# Altium PCB 2.PcbDoc
Units mm, origin at the board's own origin, x right, y up, seen from the top; angles counter-clockwise.
Board outline 61.34 x 53.59 mm, 2 copper layers (Top Layer, Bottom Layer); 11 components, 38 nets, 102 pads, 0 vias.
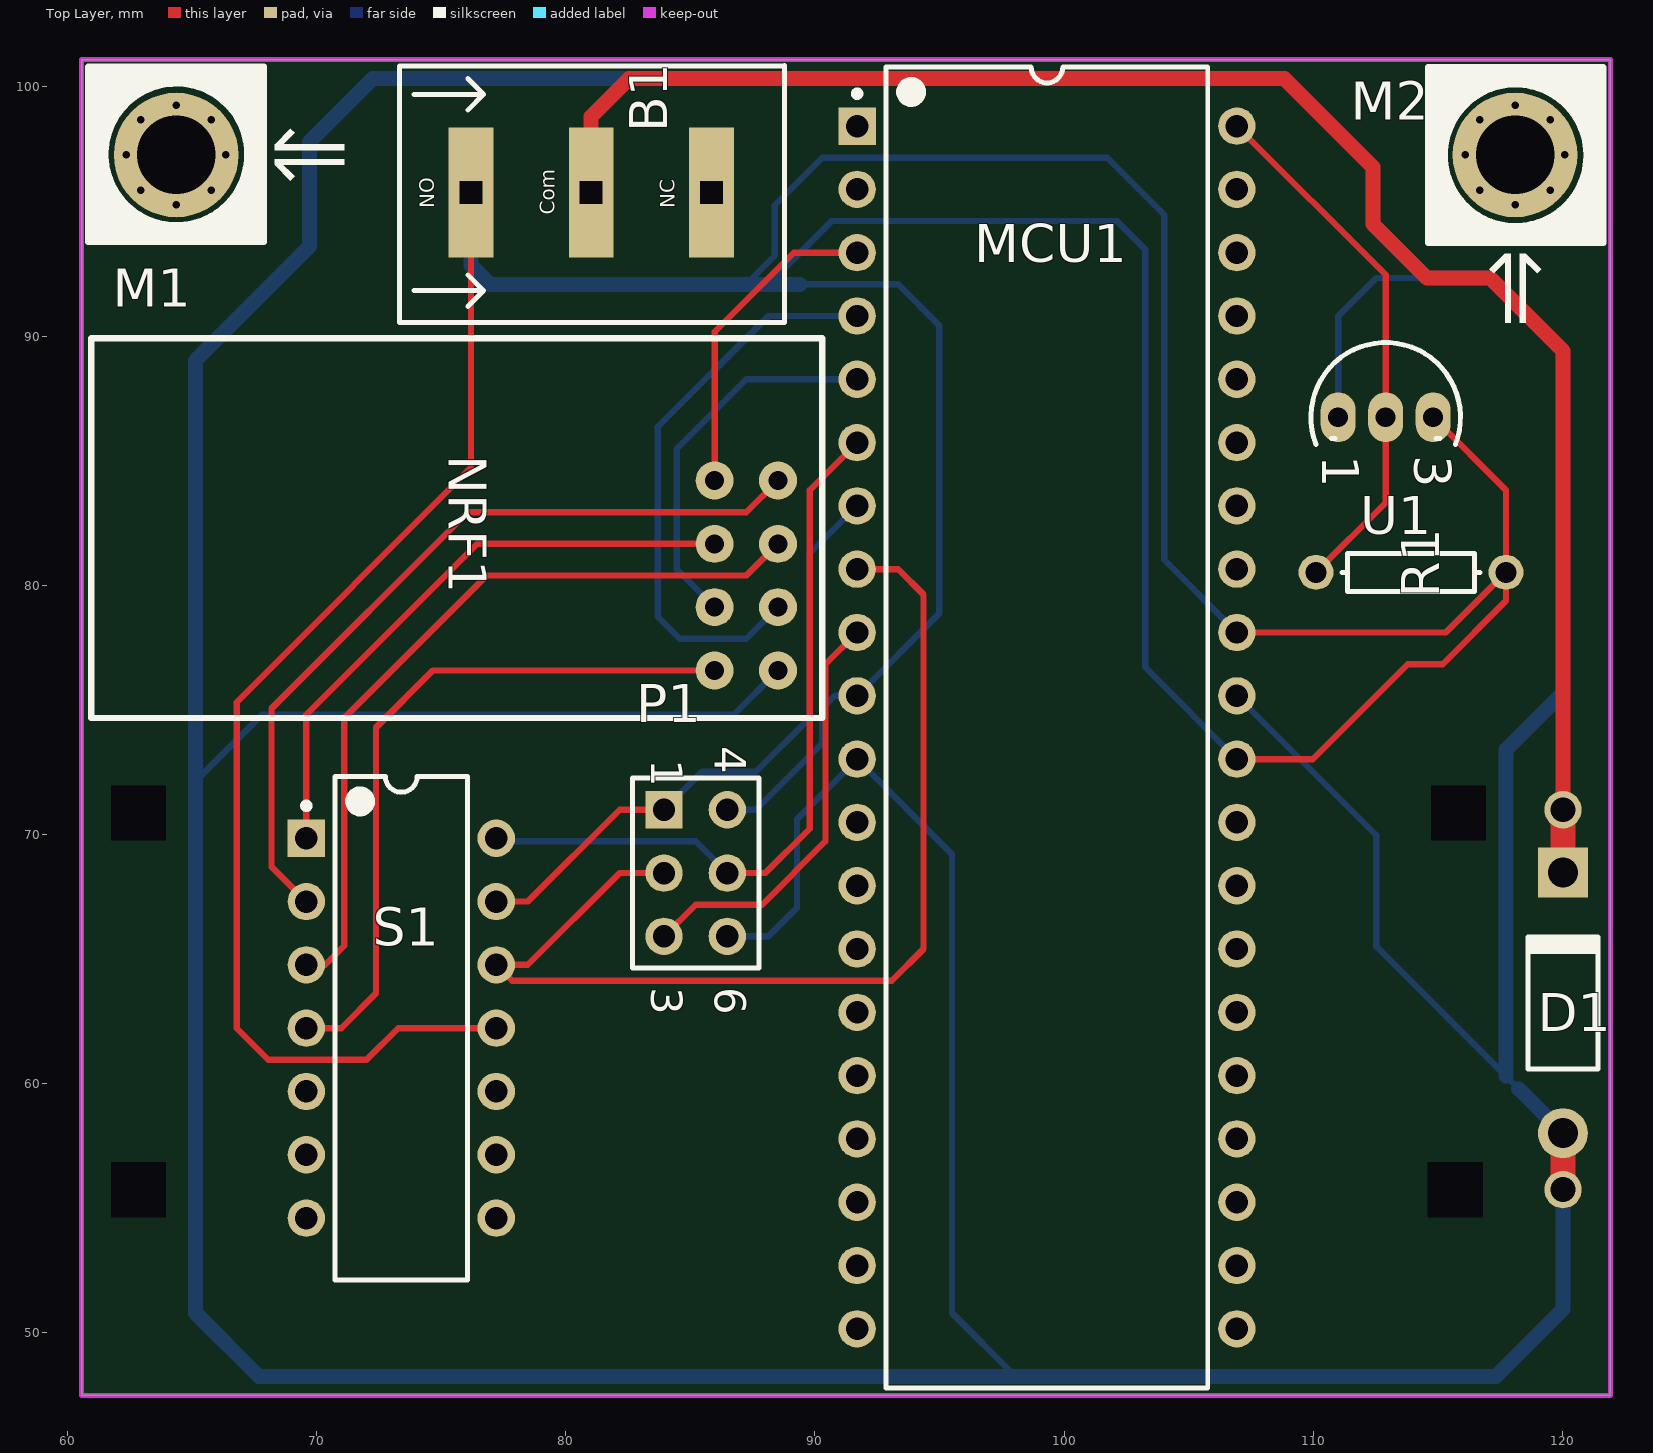
[diagram p0: Top Layer view]
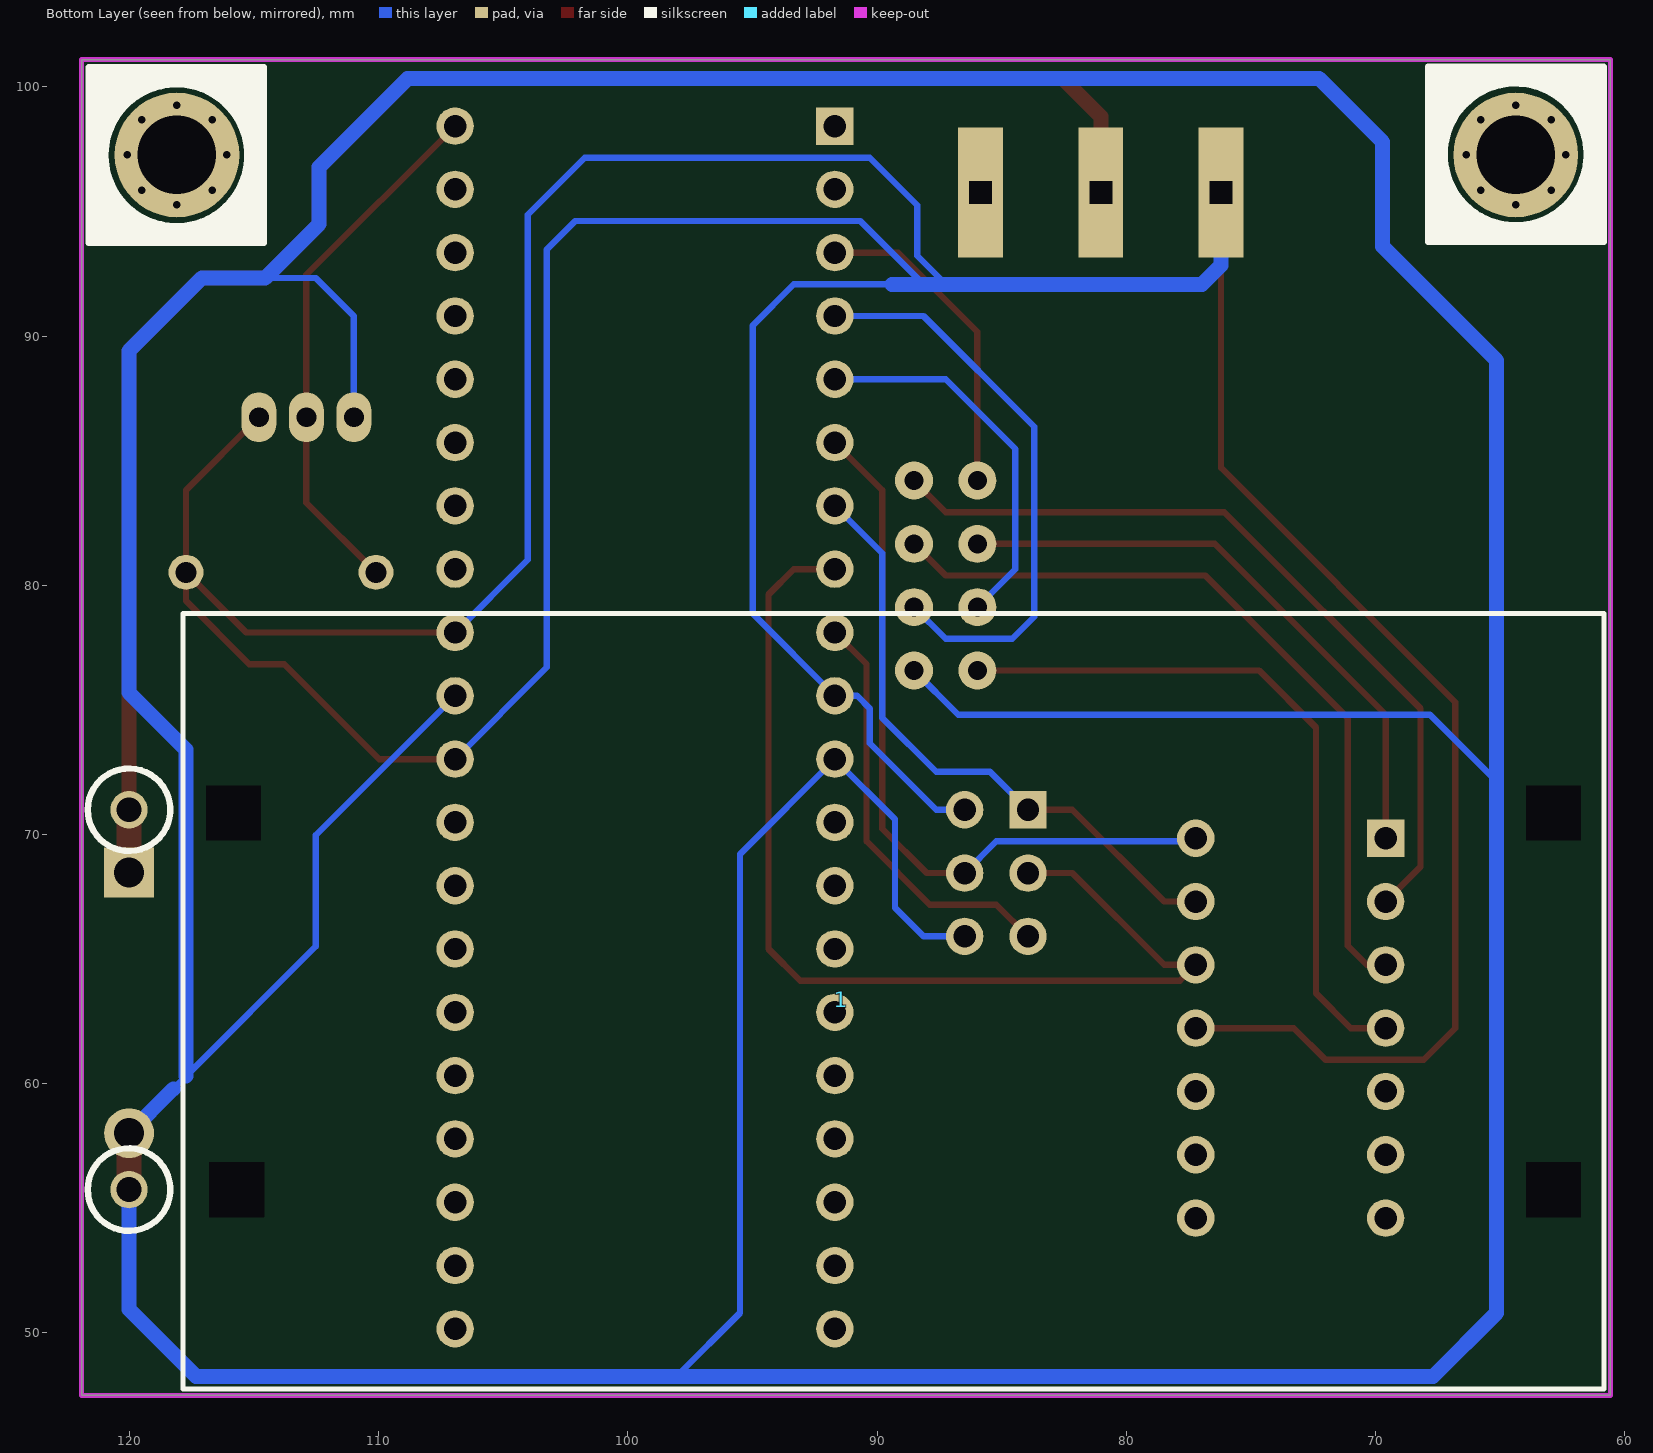
[diagram p1: Bottom Layer view, seen from below]

## Layer stack, top to bottom
Top Solder: solder mask 0.0102, Solder Resist, Dk 3.5
Top Layer: signal copper 0.0356
Dielectric 1: dielectric 0.32, FR-4, Dk 4.8
Bottom Layer: signal copper 0.0356
Bottom Solder: solder mask 0.0102, Solder Resist, Dk 3.5

## Board outline
60.579,47.498 60.579,101.092 121.92,101.092 121.92,47.498

## Design rules (kind name [scope] priority, off if disabled: settings)
Clearance [All] p1: gap=0.254 ignorepadtopadclearanceinfootprint=FALSE except(0: Arc-Hole Track-Hole SMDPad-Hole THPad-Hole Via-Hole Fill-Hole Poly-Hole Region-Hole Text-Hole)
PolygonConnect [All] p1: connectstyle=Relief reliefconductorwidth=0.254 reliefentries=4 polygonreliefangle="90 Angle" airgapwidth=0.254
RoutingVias [All] p1: holewidth=0.711 width=1.27 viastyle="Through Hole" minholewidth=0.711 minwidth=1.27 maxholewidth=0.711 maxwidth=1.27
SolderMaskExpansion [All] p1: expansion=0.102
Width [All] p1: maxlimit=1 minlimit=0.254 preferedwidth=0.254 minimp=50.000000 maximp=50.000000 favimp=50.000000
30 further rules are at their usual default settings.

## Components (designator, comment, footprint, x,y, rotation, side; value= is the part's Value field where it differs from the comment)
1 "Battery Holder" "Battery Holder" 83.566,63.5 r0 bottom
B1 "Small Cooler Button" "Small cooler button" 79.502,95.885 r0 top
D1 "Diode 1N4004" DO-41 120.015,63.246 r90 top
M1 "Screw" "Board Screw" 64.372,97.265 r90 top
M2 "Screw" "Board Screw" 118.093,97.265 r0 top
MCU1 "DIP Package" 40P6 99.314,74.295 r0 top
NRF1 "NRF24L01" PCBComponent_1 88.519,84.201 r0 top
P1 "Header 3X2A" HDR2X3_CEN 83.947,70.993 r270 top
R1 "Res1" AXIAL-0.3 113.919,80.518 r180 top value=4.7K
S1 "SW DIP-7" DIP-14 73.406,62.23 r0 top
U1 "DS1820" DS1820 112.903,86.741 r270 top

## Footprints (in the part's own frame and the unit in brackets; to place one, negate y for a bottom-side part, rotate by r counter-clockwise, add the part's x,y. Pads: shape width x height; smd on the part's side, far side on the other; paste and mask are expansions set on the pad)
40P6 [mm] "40-Pin Ceramic Dual In-Line Package (CerDIP)"
  rect 1.5x1.5 hole 0.9: 1(-7.62,24.13)
  round 1.5 hole 0.9: 2(-7.62,21.59) 3(-7.62,19.05) 4(-7.62,16.51) 5(-7.62,13.97) 6(-7.62,11.43) 7(-7.62,8.89) 8(-7.62,6.35) 9(-7.62,3.81) 10(-7.62,1.27) 11(-7.62,-1.27) 12(-7.62,-3.81) 13(-7.62,-6.35) 14(-7.62,-8.89) 15(-7.62,-11.43) 16(-7.62,-13.97) 17(-7.62,-16.51) 18(-7.62,-19.05) 19(-7.62,-21.59) 20(-7.62,-24.13) 21(7.62,-24.13) 22(7.62,-21.59) 23(7.62,-19.05) 24(7.62,-16.51) 25(7.62,-13.97) 26(7.62,-11.43) 27(7.62,-8.89) 28(7.62,-6.35) 29(7.62,-3.81) 30(7.62,-1.27) 31(7.62,1.27) 32(7.62,3.81) 33(7.62,6.35) 34(7.62,8.89) 35(7.62,11.43) 36(7.62,13.97) 37(7.62,16.51) 38(7.62,19.05) 39(7.62,21.59) 40(7.62,24.13)
  silkscreen extent -7.74,-26.5 6.45,26.5, body extent -7.05,-26.47 7.05,26.47, height 4.83
AXIAL-0.3 [mm] "Axial Device, Thru-Hole; 2 Leads; 0.3 in Pin Spacing"
  round 1.4 hole 0.85: 1(-3.81,0) 2(3.81,0)
  silkscreen extent -2.77,-0.76 2.77,0.76
"Battery Holder" [mm]
  rect 2x2 hole 2.2 square: 2(-20.701,7.747) 3(-20.701,-7.366) 4(32.131,7.747) 5(32.258,-7.366)
  round 1.5 hole 1: 6(36.451,7.747) 7(36.451,-7.493)
  silkscreen extent -22.73,-15.37 38.11,15.75
"Board Screw" [mm]
  round 0.6 hole 0.3: S(-2,0) S(-1.414,-1.414) S(-1.414,1.414) S(0,2) S(0,-2) S(1.414,-1.414) S(1.414,1.414) S(2,0)
  round 5 hole 3.15 mask+0.1: S(0,0)
  silkscreen extent -3.49,-6.75 3.56,3.52
DIP-14 [mm] "DIP; 14 Leads; Row Spacing 7.62 mm; Pitch 2.54 mm"
  rect 1.5x1.5 hole 0.9: 1(-3.81,7.62)
  round 1.5 hole 0.9: 2(-3.81,5.08) 3(-3.81,2.54) 4(-3.81,0) 5(-3.81,-2.54) 6(-3.81,-5.08) 7(-3.81,-7.62) 8(3.81,-7.62) 9(3.81,-5.08) 10(3.81,-2.54) 11(3.81,0) 12(3.81,2.54) 13(3.81,5.08) 14(3.81,7.62)
  silkscreen extent -3.93,-10.1 2.65,10.1, body extent -3.6,-10.1 3.6,10.1, height 5.08
DO-41 [mm] "Diode, Axial; Body 5.2 x 2.7 mm (LxDia. max), Lead Dia. 0.86 mm (max)"
  round 2 hole 1.2: 1(-5.23,0)
  rect 2x2 hole 1.2: 2(5.23,0)
  silkscreen extent -2.65,-1.4 2.75,1.4
DS1820 [mm]
  oval 2x1.4 hole 0.8: 1(0,-1.905) 2(0,0) 3(0,1.905)
  silkscreen extent -3,-3 1.09,3
HDR2X3_CEN [mm] "Connector; Header; 3x2 Position"
  rect 1.5x1.5 hole 0.9: 1(0,0)
  round 1.5 hole 0.9: 2(2.54,0) 3(5.08,0) 4(0,2.54) 5(2.54,2.54) 6(5.08,2.54)
  silkscreen extent -1.27,-1.27 6.35,3.81
PCBComponent_1 [mil]
  round 60 hole 30: CE(0,-200) CSN(-100,-200) GND(0,-300) IRQ(-100,0) MISO(0,0) MOSI(-100,-100) SCK(0,-100) VCC(-100,-300)
  silkscreen extent -1085,-375 70,225, body extent -1082,-365 60,225, height 138
"Small cooler button" [mm]
  rect 1.8x5.2 hole 0.9 square: 1(1.524,-0.127) 2(6.35,-0.127) 3(-3.302,-0.127)
  silkscreen extent -6.16,-5.35 9.27,4.97

## Part data
D1: "1 Amp General Purpose Rectifier", Code_JEDEC=DO-204-AL, ComponentLink1Description="Manufacturer Link", ComponentLink1URL=http://www.fairchildsemi.com/, ComponentLink2Description=Datasheet, ComponentLink2URL=http://www.fairchildsemi.com/ds/1N%2F1N4001.pdf, DatasheetVersion=1998, LatestRevisionDate=17-Jul-2002, LatestRevisionNote="Re-released for DXP Platform.", PackageDescription="Diode, Axial; Body 5.2 x 2.7 mm (LxDia. max), Lead Dia. 0.86 mm (max)", PackageReference=DO-41, PackageVersion=Aug-1999, Published=8-Jun-2000, Publisher="Altium Limited"
M1 M2: library part "Board Screw", "Board Screw With Spacer"
MCU1: library part ATmega32A-PU, "8-bit AVR Microcontroller, 2.7-5.5V, 16MHz, 32KB Flash, 1KB EEPROM, 2KB SRAM, 40-pin PDIP, Industrial Grade (-40°C to 85°C)", Code_JEDEC=MS-011-AC, ComponentLink1Description="Manufacturer URL", ComponentLink1URL=http://www.atmel.com/, ComponentLink2Description="ATmega32A Datasheet", ComponentLink2URL=http://www.atmel.com/dyn/resources/prod_documents/doc8155.pdf, ComponentLink3Description="ATmega32A Summary", ComponentLink3URL=http://www.atmel.com/dyn/resources/prod_documents/8155S.pdf, DatasheetVersion="revC, Feb-2011", PackageDescription="40-lead (0.600\"/15.24mm Wide) Plastic Dual Inline Package (PDIP)", PackageReference=40P6, PackageVersion="revB, Sep-2001"
P1: "Header, 3-Pin, Dual row", LatestRevisionDate=17-Jul-2002, LatestRevisionNote="Re-released for DXP Platform.", Publisher="Altium Limited"
R1: "Resistor", LatestRevisionDate=17-Jul-2002, LatestRevisionNote="Re-released for DXP Platform.", PackageDescription="Axial Device, Thru-Hole; 2 Leads; 0.3 in Pin Spacing", PackageReference=AXIAL-0.3, Published=8-Jun-2000, Publisher="Altium Limited"
S1: "DIP Switch, 7 Position, SPST", Code_JEDEC=MO-001-AF, LatestRevisionDate=17-Jul-2002, LatestRevisionNote="Re-released for DXP Platform.", PackageReference=DIP-14, Published=24-Mar-1999, Publisher="Altium Limited"
U1: "1-Wire Digital Thermometer", ComponentAvailability=Obsolete, ComponentLink1Description="Manufacturer Link", ComponentLink1URL=http://www.maxim-ic.com/, ComponentLink2Description=Datasheet, ComponentLink2URL=http://pdfserv.maxim-ic.com/en/ds/DS1820-DS1820S.pdf, ComponentLink3Description="Discontinuation Notice", ComponentLink3URL=http://www.maxim-ic.com/qa/pdfs/non-obsolescence-letter.pdf, DatasheetVersion=5-Mar-1998, LatestRevisionDate=17-Jul-2002, LatestRevisionNote="Re-released for DXP Platform.", PackageDescription="TO, Flat Index; 3 In-Line, Axial Leads; Body Dia. 4.6mm; Leads 0.56 x 0.51 mm (max)", PackageReference=PR35, PackageVersion=1999, Published=13-Oct-2000, Publisher="Altium Limited"

## Nets (pads, with @x,y where several pads share a name; then routed paths per layer and width w, separated by ;. In a path a pad name is that pad's centre, name@x,y a point inside that pad or via, vN(x,y) a via of type N, cw(c..) or ccw(c..) an arc to the next point about the centre after c; other vN are vias at no path point)
A1: MCU1.39
A2: MCU1.38
A3: MCU1.37
A4: MCU1.36
A5: MCU1.35
A6: MCU1.34
A7: MCU1.33
B2: MCU1.3 NRF1.IRQ | length 13
  Top Layer w0.254: NRF1.IRQ 85.979,90.17 89.154,93.345 MCU1.3
B3: MCU1.4 NRF1.CE | length 23.2
  Bottom Layer w0.254: NRF1.CE 87.249,77.851 84.582,77.851 83.693,78.74 83.693,86.36 88.138,90.805 MCU1.4
C0: MCU1.22
C1: MCU1.23
C2: MCU1.24
C3: MCU1.25
C4: MCU1.26
C5: MCU1.27
C6: MCU1.28
C7: MCU1.29
D0: MCU1.14
D1: MCU1.15
D2: MCU1.16
D3: MCU1.17
D4: MCU1.18
D5: MCU1.19
D6: MCU1.20
D7: MCU1.21
GND: 1.6 D1.1 MCU1.11 MCU1.31 NRF1.GND P1.6 U1.1 | length 294.3
  Top Layer w0.254: 1.6@120.015,55.755 1.6
  Top Layer w1: 1.6@120.015,55.755 D1.1
  Bottom Layer w0.254: 65.151,72.136 67.818,74.803 86.741,74.803 NRF1.GND ; P1.6 88.138,65.913 89.281,67.056 89.281,70.612 MCU1.11 95.504,69.215 95.504,50.8 98.044,48.26 ; MCU1.31 112.522,69.977 112.522,65.509 117.729,60.302 118.237,59.794 ; U1.1 110.998,90.805 112.522,92.329 114.554,92.329
  Bottom Layer w0.6: 117.729,60.302 117.729,73.406 120.015,75.692 120.015,89.408 117.094,92.329 114.554,92.329 112.395,94.488 112.395,96.774 108.839,100.33 72.263,100.33 69.723,97.79 69.723,93.599 65.151,89.027 65.151,72.136 65.151,50.8 67.691,48.26 98.044,48.26 117.329,48.26 120.017,50.948 1.6 ; 118.237,59.794 D1.1
MISO: MCU1.7 P1.1 S1.13 | length 24.9
  Top Layer w0.254: S1.13 78.486,67.31 82.169,70.993 P1.1
  Bottom Layer w0.254: P1.1 85.471,72.517 87.63,72.517 89.789,74.676 89.789,81.28 MCU1.7
MOSI: MCU1.6 P1.5 S1.14 | length 30.2
  Top Layer w0.254: P1.5 88.011,68.453 89.789,70.231 89.789,83.82 MCU1.6
  Bottom Layer w0.254: S1.14 77.343,69.723 85.217,69.723 P1.5
N_MISO: NRF1.MISO S1.2 | length 32.4
  Top Layer w0.254: S1.2 68.199,68.707 68.199,75.057 76.073,82.931 87.249,82.931 NRF1.MISO
N_MOSI: NRF1.MOSI S1.1 | length 24.2
  Top Layer w0.254: S1.1 69.596,74.803 76.454,81.661 NRF1.MOSI
N_SCK: NRF1.SCK S1.3 | length 31.3
  Top Layer w0.254: S1.3 70.358,64.77 71.12,65.532 71.12,74.676 76.835,80.391 87.249,80.391 NRF1.SCK
N_VCC: NRF1.VCC S1.4 | length 28.6
  Top Layer w0.254: S1.4 70.993,62.23 72.39,63.627 72.39,74.295 74.676,76.581 NRF1.VCC
Net1_7: 1.7 B1.1 D1.2 | length 69.5
  Top Layer w0.254: 1.7@120.015,70.991 1.7
  Top Layer w0.6: B1.1 81.026,98.806 82.55,100.33 108.839,100.33 112.395,96.774 112.395,94.488 114.554,92.329 117.094,92.329 120.017,89.406 1.7
  Top Layer w1: D1.2 1.7@120.015,70.991
NetMCU1_40: MCU1.40 R1.2 U1.2 | length 21.5
  Top Layer w0.254: MCU1.40 112.903,92.456 U1.2 112.903,83.312 R1.2
RST: MCU1.9 P1.3 | length 17.1
  Top Layer w0.254: P1.3@84.074,65.786 P1.3 85.217,67.183 87.884,67.183 90.424,69.723 90.424,76.835 MCU1.9
SCK: MCU1.8 P1.2 S1.12 | length 43.5
  Top Layer w0.254: P1.2 82.169,68.453 78.486,64.77 S1.12 77.851,64.135 93.091,64.135 94.361,65.405 94.361,79.629 93.345,80.645 MCU1.8
SS: MCU1.5 NRF1.CSN | length 15.4
  Bottom Layer w0.254: NRF1.CSN 84.455,80.645 84.455,85.471 87.249,88.265 MCU1.5
VCC: B1.3 MCU1.10 MCU1.30 MCU1.32 P1.4 R1.1 S1.11 U1.3 | length 207.1
  Top Layer w0.254: B1.3 76.2,84.709 66.802,75.311 66.802,62.23 68.072,60.96 72.009,60.96 73.279,62.23 S1.11 ; MCU1.30 109.982,73.025 113.792,76.835 115.189,76.835 117.729,79.375 R1.1 ; MCU1.32 115.316,78.105 R1.1 ; U1.3 117.729,83.82 R1.1
  Bottom Layer w0.254: P1.4 87.63,70.993 90.297,73.66 90.297,75.057 90.805,75.565 MCU1.10 94.996,78.867 94.996,90.424 93.345,92.075 89.408,92.075 ; 87.249,92.075 88.392,93.218 88.392,95.25 90.297,97.155 101.727,97.155 104.013,94.869 104.013,81.026 MCU1.32 ; 88.138,92.075 90.678,94.615 102.108,94.615 103.251,93.472 103.251,76.708 MCU1.30
  Bottom Layer w0.6: B1.3 76.2,92.837 76.962,92.075 87.249,92.075 88.138,92.075 89.408,92.075
pads on no net: 1.2 1.3 1.4 1.5 B1.2 M1.S M2.S MCU1.1 MCU1.2 MCU1.12 MCU1.13 S1.5 S1.6 S1.7 S1.8 S1.9 S1.10

## Keep-outs
Keep-Out Layer:
  lines w0.2: 60.579,47.498 121.92,47.498 121.92,101.092 60.579,101.092 60.579,98.298 60.579,47.498

## Text inside footprints (layer, text, board x,y; h text height)
B1: Top Overlay "Com" at 79.756,94.869 h1 r90; Top Overlay "NC" at 84.582,95.123 h1 r90; Top Overlay "NO" at 74.93,95.123 h1 r90
P1: Top Overlay "6" at 85.979,63.881 h1.27 r270; Top Overlay "3" at 83.439,63.881 h1.27 r270; Top Overlay "1" at 83.439,73.025 h1.27 r270; Top Overlay "4" at 85.979,73.533 h1.27 r270
U1: Top Overlay "1" at 110.363,85.217 h1.5 r270; Top Overlay "3" at 114.046,85.217 h1.5 r270